# Altium PCB altium.pcbdoc
Units mm, origin at the board's own origin, x right, y up, seen from the top; angles counter-clockwise.
Board outline 35.65 x 35.65 mm, 2 copper layers (Top Layer, Bottom Layer); 6 components, 11 nets, 35 pads, 23 vias.
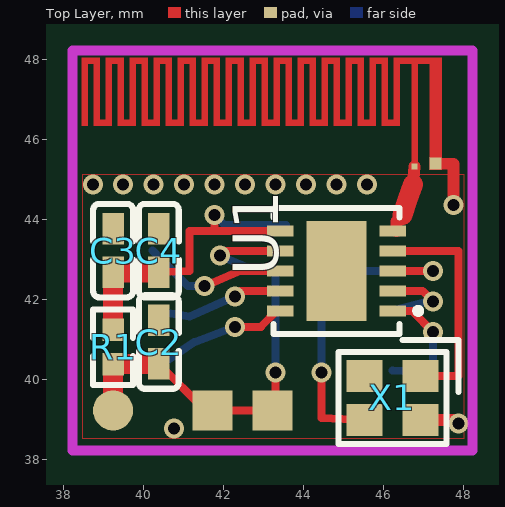
[diagram p0: Top Layer view]
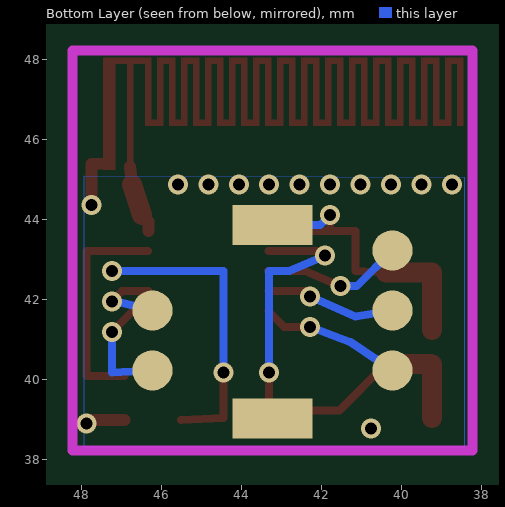
[diagram p1: Bottom Layer view, seen from below]

## Layer stack, top to bottom
Top Layer: signal copper (thickness not stored)
Dielectric: dielectric 0.32, FR-4, Dk 4.8
Bottom Layer: signal copper (thickness not stored)

## Board outline
61.054,25.4 25.4,25.4 25.4,61.054 61.054,61.054

## Components (designator, comment, footprint, x,y, rotation, side; value= is the part's Value field where it differs from the comment)
C2 "C0402" C0402 40.386,40.937 r90 top
C3 "C0402" C0402 39.243,43.223 r90 top
C4 "C0402" C0402 40.386,43.223 r90 top
R1 "R0402" R0402 39.243,40.81 r90 top
U1 "DFN-10_L3.0-W3.0-P0.50-BL-EP2.5" DFN-10_L3.0-W3.0-P0.50-BL-EP2.5 44.831,42.715 r90 top
X1 "CRYSTAL-SMD_4P-L2.0-W1.6-BL" CRYSTAL-SMD_4P-L2.0-W1.6-BL 46.228,39.54 r180 top

## Footprints (in the part's own frame and the unit in brackets; to place one, negate y for a bottom-side part, rotate by r counter-clockwise, add the part's x,y. Pads: shape width x height; smd on the part's side, far side on the other; paste and mask are expansions set on the pad)
C0402 [mm]
  rect 0.79x0.54 smd paste-100 mask+0.051: 1(-0.545,0) 2(0.545,0)
  silkscreen extent -1.17,-0.5 1.17,0.5
CRYSTAL-SMD_4P-L2.0-W1.6-BL [mm]
  rect 0.9x0.8 smd paste+0 mask+0.051: 1(-0.7,-0.55) 2(0.7,-0.55) 3(0.7,0.55) 4(-0.7,0.55)
  silkscreen extent -1.65,-1.45 1.35,1.15
DFN-10_L3.0-W3.0-P0.50-BL-EP2.5 [mm]
  rect 0.28x0.665 smd paste+0 mask+0.05: 1(-1,-1.407) 2(-0.5,-1.407) 3(0,-1.407) 4(0.5,-1.407) 5(1,-1.407) 6(1,1.407) 7(0.5,1.407) 8(0,1.407) 9(-0.5,1.407) 10(-1,1.407)
  rect 2.5x1.5 smd paste+0 mask+0.05: 11(0,0)
  silkscreen extent -1.58,-2.12 1.58,1.58
R0402 [mm]
  rect 0.566x0.54 smd paste-100 mask+0.051: 1(-0.433,0) 2(0.433,0)
  silkscreen extent -0.94,-0.5 0.94,0.5

## Free pads (board coordinates)
  rect 0.3x0.3 smd paste+0 mask+0.051: 0(47.308,45.399)
  rect 0.15x0.15 smd paste+0 mask+0.051: 1(46.783,45.324)
  rect 2x1 smd far side paste+0 mask+0.051: 2(43.227,39.027) 2(43.227,43.858)
  rect 1x1 smd paste+0 mask+0.051: 4(41.727,39.227) 4(43.227,39.227)
  round 1 smd paste+0 mask+0.051: 5(39.243,39.227)
  round 1 smd far side paste+0 mask+0.051: 6(40.227,40.227) 6(40.227,41.727) 6(40.227,43.227) 6(46.227,40.227) 6(46.227,41.727)

## Via types
v1: diameter 0.5, hole 0.3, Top Layer to Bottom Layer, tented both sides, 23 vias

## Nets (pads, with @x,y where several pads share a name; then routed paths per layer and width w, separated by ;. In a path a pad name is that pad's centre, name@x,y a point inside that pad or via, vN(x,y) a via of type N, cw(c..) or ccw(c..) an arc to the next point about the centre after c; other vN are vias at no path point)
ANT: pad.1 U1.5 | length 1.7
  Top Layer w0.3: U1.5@46.331,43.716 46.331,43.954 46.505,44.127 ; 46.736,44.874 pad.1
  Top Layer w0.5: 46.482,44.112 46.609,44.493 46.736,44.874
GND: C2.2 C3.2 C4.2 pad.0 pad.2@43.227,39.027 U1.11 X1.2 X1.4 | length 2.4
  Top Layer w0.3: X1.4 47.794,38.99 v1(47.879,38.905) ; pad.0 47.752,45.382 v1(47.752,44.366)
  other v1: 40.767,38.778 38.735,44.874 39.497,44.874 40.259,44.874 41.021,44.874 41.783,44.874 42.545,44.874 43.307,44.874 44.069,44.874 44.831,44.874 45.593,44.874
PA0: pad.6@40.227,43.227 U1.8 | length 3.6
  Top Layer w0.2: v1(41.529,42.334) 42.418,42.715 U1.8@43.332,42.715
  Bottom Layer w0.2: pad.6@40.227,43.227 41.12,42.334 v1(41.529,42.334)
PA1: pad.6@40.227,41.727 U1.9 | length 3.3
  Top Layer w0.2: v1(42.291,42.08) 42.426,42.215 U1.9@43.331,42.215
  Bottom Layer w0.2: pad.6@40.227,41.725 41.148,41.572 v1(42.291,42.08)
PA2: pad.6@46.227,40.227 U1.1 | length 3.2
  Top Layer w0.2: U1.1@46.331,41.714 46.721,41.714 v1(47.244,41.191)
  Bottom Layer w0.2: pad.6@46.227,40.227 47.244,40.175 v1(47.244,41.191)
PA3: pad.6@46.227,41.727 U1.2 | length 2.1
  Top Layer w0.2: U1.2@46.331,42.215 46.982,42.215 v1(47.244,41.953)
  Bottom Layer w0.2: pad.6@46.228,41.727 47.117,41.953 v1(47.244,41.953)
PA7: pad.6@40.227,40.227 U1.10 | length 3.6
  Top Layer w0.2: v1(42.291,41.318) 42.935,41.318 U1.10@43.331,41.714
  Bottom Layer w0.2: pad.6@40.227,40.227 41.275,40.937 v1(42.291,41.318)
V5: C2.1 pad.4 pad.5 R1.1 U1.7 | length 12.3
  Top Layer w0.2: C2.1 41.551,39.227 41.727,39.227 43.227,39.227 43.307,39.307 v1(43.307,40.175) ; v1(41.91,43.096) 42.029,43.216 U1.7@43.331,43.216
  Top Layer w0.5: pad.5@39.243,39.032 R1.1 39.258,40.392 C2.1
  Bottom Layer w0.2: v1(41.91,43.096) 42.799,42.715 43.307,42.715 v1(43.307,40.175)
VCC: C3.1 C4.1 pad.2@43.227,43.858 R1.2 U1.6 | length 8.8
  Top Layer w0.2: C4.1 41.148,42.715 41.148,43.716 U1.6@43.331,43.716 ; 41.783,43.716 v1(41.783,44.112)
  Top Layer w0.5: R1.2 C3.1 C4.1
  Bottom Layer w0.2: v1(41.783,44.112) 42.037,43.858 pad.2@43.561,43.858
X32MI: U1.4 X1.1 | length 5.6
  Top Layer w0.2: U1.4@46.332,43.216 47.879,43.216 47.879,40.091 X1.1
X32MO: U1.3 X1.3 | length 8.5
  Top Layer w0.2: v1(44.45,40.175) 44.45,39.794 44.45,39.032 X1.3@45.517,38.989 ; U1.3@46.331,42.715 v1(47.244,42.715)
  Bottom Layer w0.2: v1(44.45,40.175) 44.45,42.715 v1(47.244,42.715)

## Polygon pours and split planes (outlines as drawn)
GND on Bottom Layer (solid): 38.417,45.049 47.942,45.081 47.942,38.318 38.417,38.318
GND on Top Layer (solid): 38.481,45.128 48.006,45.128 48.006,38.524 38.481,38.524

## Other copper
Top Layer:
  region: 47.458,48.049 47.158,48.049 47.158,45.249 47.458,45.249 47.458,48.049
  region: 46.858,48.049 46.708,48.049 46.708,45.249 46.858,45.249 46.858,48.049
  region: 47.458,47.899 47.458,48.049 46.708,48.049 46.708,47.899 47.458,47.899
  region: 46.408,48.049 46.258,48.049 46.258,46.349 46.408,46.349 46.408,48.049
  region: 46.108,48.049 45.958,48.049 45.958,46.349 46.108,46.349 46.108,48.049
  region: 45.808,48.049 45.658,48.049 45.658,46.349 45.808,46.349 45.808,48.049
  region: 45.508,48.049 45.358,48.049 45.358,46.349 45.508,46.349 45.508,48.049
  region: 45.208,48.049 45.058,48.049 45.058,46.349 45.208,46.349 45.208,48.049
  region: 46.708,48.049 46.258,48.049 46.258,47.899 46.708,47.899 46.708,48.049
  region: 46.108,48.049 45.658,48.049 45.658,47.899 46.108,47.899 46.108,48.049
  region: 45.508,48.049 45.058,48.049 45.058,47.899 45.508,47.899 45.508,48.049
  region: 46.408,46.499 45.958,46.499 45.958,46.349 46.408,46.349 46.408,46.499
  region: 45.808,46.499 45.358,46.499 45.358,46.349 45.808,46.349 45.808,46.499
  region: 44.608,46.499 44.158,46.499 44.158,46.349 44.608,46.349 44.608,46.499
  region: 45.208,46.499 44.758,46.499 44.758,46.349 45.208,46.349 45.208,46.499
  region: 44.308,48.049 43.858,48.049 43.858,47.899 44.308,47.899 44.308,48.049
  region: 44.908,48.049 44.458,48.049 44.458,47.899 44.908,47.899 44.908,48.049
  region: 44.008,48.049 43.858,48.049 43.858,46.349 44.008,46.349 44.008,48.049
  region: 44.308,48.049 44.158,48.049 44.158,46.349 44.308,46.349 44.308,48.049
  region: 44.608,48.049 44.458,48.049 44.458,46.349 44.608,46.349 44.608,48.049
  region: 44.908,48.049 44.758,48.049 44.758,46.349 44.908,46.349 44.908,48.049
  region: 43.408,46.499 42.958,46.499 42.958,46.349 43.408,46.349 43.408,46.499
  region: 44.008,46.499 43.558,46.499 43.558,46.349 44.008,46.349 44.008,46.499
  region: 43.108,48.049 42.658,48.049 42.658,47.899 43.108,47.899 43.108,48.049
  region: 43.708,48.049 43.258,48.049 43.258,47.899 43.708,47.899 43.708,48.049
  region: 42.808,48.049 42.658,48.049 42.658,46.349 42.808,46.349 42.808,48.049
  region: 43.108,48.049 42.958,48.049 42.958,46.349 43.108,46.349 43.108,48.049
  region: 43.408,48.049 43.258,48.049 43.258,46.349 43.408,46.349 43.408,48.049
  region: 43.708,48.049 43.558,48.049 43.558,46.349 43.708,46.349 43.708,48.049
  region: 42.208,46.499 41.758,46.499 41.758,46.349 42.208,46.349 42.208,46.499
  region: 42.808,46.499 42.358,46.499 42.358,46.349 42.808,46.349 42.808,46.499
  region: 41.908,48.049 41.458,48.049 41.458,47.899 41.908,47.899 41.908,48.049
  region: 42.508,48.049 42.058,48.049 42.058,47.899 42.508,47.899 42.508,48.049
  region: 41.608,48.049 41.458,48.049 41.458,46.349 41.608,46.349 41.608,48.049
  region: 41.908,48.049 41.758,48.049 41.758,46.349 41.908,46.349 41.908,48.049
  region: 42.208,48.049 42.058,48.049 42.058,46.349 42.208,46.349 42.208,48.049
  region: 42.508,48.049 42.358,48.049 42.358,46.349 42.508,46.349 42.508,48.049
  region: 41.008,46.499 40.558,46.499 40.558,46.349 41.008,46.349 41.008,46.499
  region: 41.608,46.499 41.158,46.499 41.158,46.349 41.608,46.349 41.608,46.499
  region: 40.708,48.049 40.258,48.049 40.258,47.899 40.708,47.899 40.708,48.049
  region: 41.308,48.049 40.858,48.049 40.858,47.899 41.308,47.899 41.308,48.049
  region: 40.408,48.049 40.258,48.049 40.258,46.349 40.408,46.349 40.408,48.049
  region: 40.708,48.049 40.558,48.049 40.558,46.349 40.708,46.349 40.708,48.049
  region: 41.008,48.049 40.858,48.049 40.858,46.349 41.008,46.349 41.008,48.049
  region: 41.308,48.049 41.158,48.049 41.158,46.349 41.308,46.349 41.308,48.049
  region: 39.808,46.499 39.358,46.499 39.358,46.349 39.808,46.349 39.808,46.499
  region: 40.408,46.499 39.958,46.499 39.958,46.349 40.408,46.349 40.408,46.499
  region: 39.508,48.049 39.058,48.049 39.058,47.899 39.508,47.899 39.508,48.049
  region: 40.108,48.049 39.658,48.049 39.658,47.899 40.108,47.899 40.108,48.049
  region: 39.208,48.049 39.058,48.049 39.058,46.349 39.208,46.349 39.208,48.049
  region: 39.508,48.049 39.358,48.049 39.358,46.349 39.508,46.349 39.508,48.049
  region: 39.808,48.049 39.658,48.049 39.658,46.349 39.808,46.349 39.808,48.049
  region: 40.108,48.049 39.958,48.049 39.958,46.349 40.108,46.349 40.108,48.049
  region: 39.208,46.499 38.758,46.499 38.758,46.349 39.208,46.349 39.208,46.499
  region: 38.908,48.049 38.458,48.049 38.458,47.899 38.908,47.899 38.908,48.049
  region: 38.908,48.049 38.758,48.049 38.758,46.349 38.908,46.349 38.908,48.049
  region: 38.608,48.049 38.458,48.049 38.458,46.349 38.608,46.349 38.608,48.049